# Altium PCB MCUboard.PcbDoc
Units mil, origin at the board's own origin, x right, y up, seen from the top; angles counter-clockwise.
Board outline 3937.01 x 1377.95 mil, 2 copper layers (Top Layer, Bottom Layer); 63 components, 51 nets, 233 pads, 45 vias.
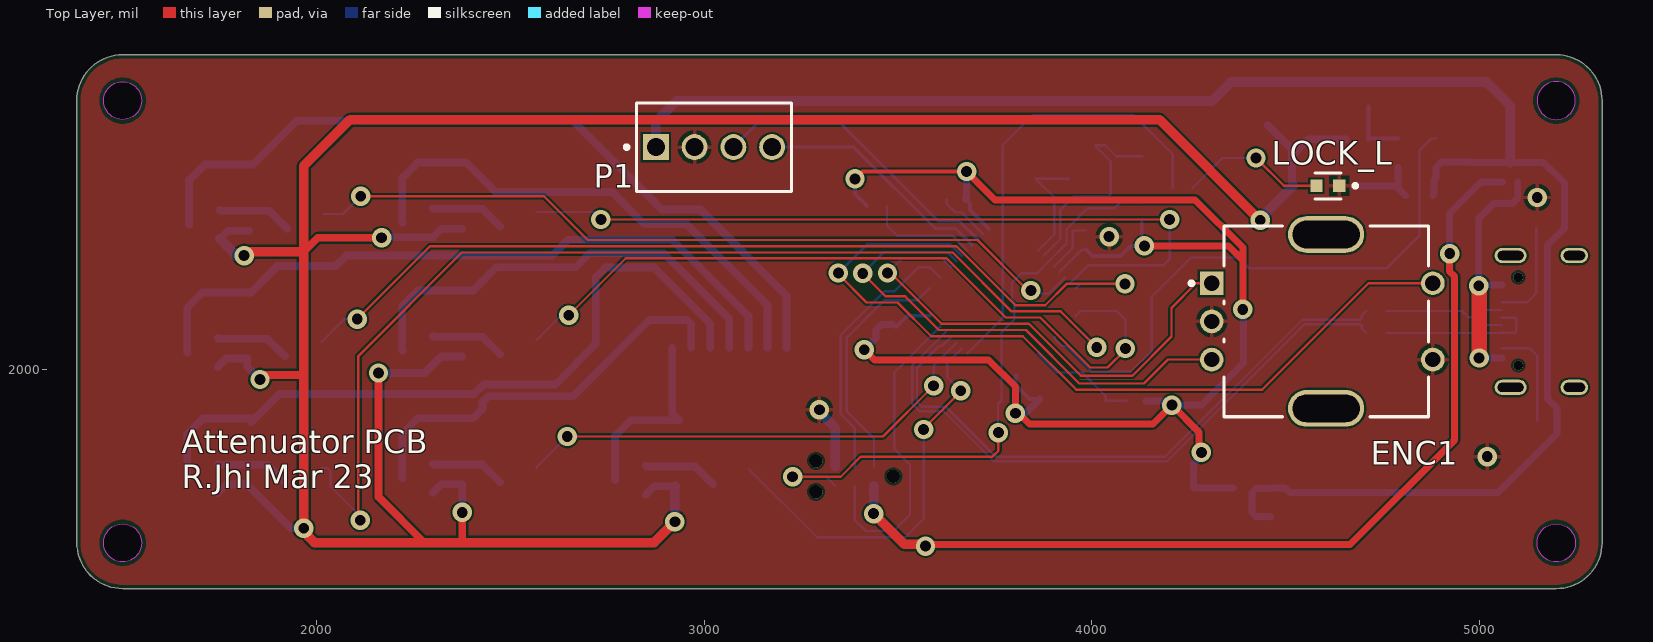
[diagram p0: Top Layer view]
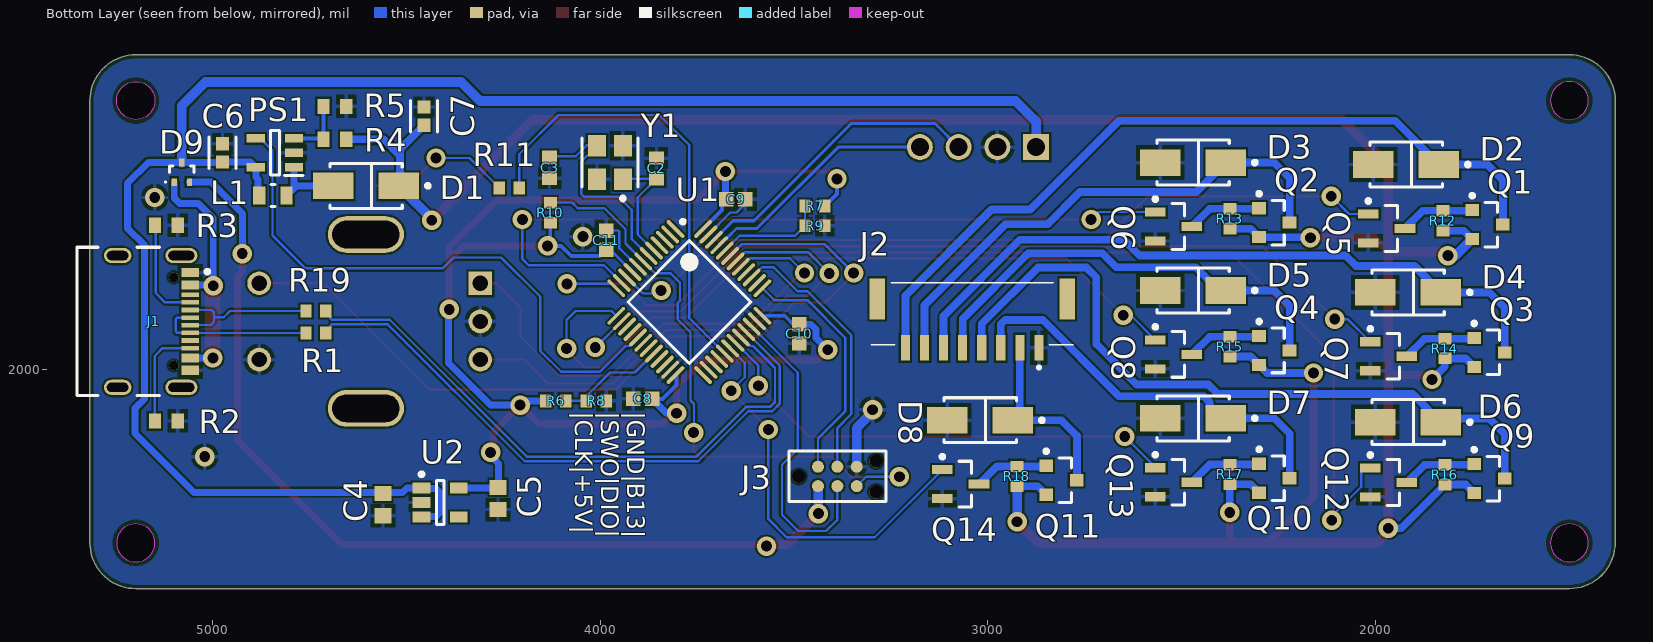
[diagram p1: Bottom Layer view, seen from below]
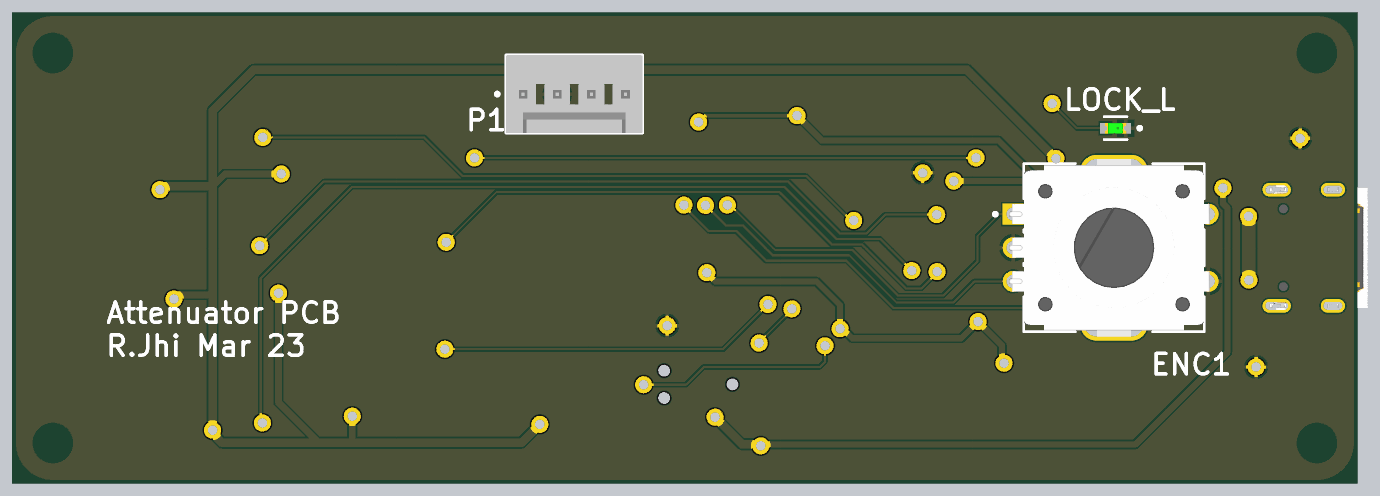
[diagram p2: 3D render of the assembled board from above, using the file's embedded part models]
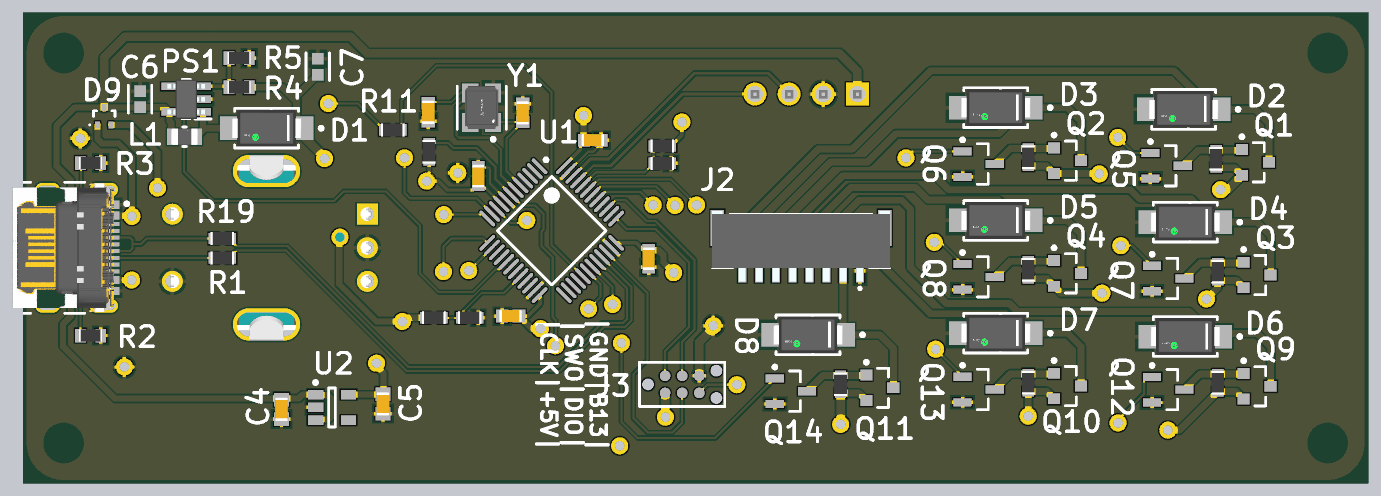
[diagram p3: 3D render of the assembled board from below, using the file's embedded part models]

## Layer stack, top to bottom
Top Solder: solder mask 0.4, Solder Resist, Dk 3.5
Top Layer: signal copper 1.4
Dielectric 1: dielectric 12.6, FR-4, Dk 4.8
Bottom Layer: signal copper 1.4
Bottom Solder: solder mask 0.4, Solder Resist, Dk 3.5

## Board outline
1498.36,1435.25 cw(c1498.36,1553.36) 1380.25,1553.36 1380.25,2695.09 cw(c1498.36,2695.09) 1498.36,2813.2 5199.15,2813.2 cw(c5199.15,2695.09) 5317.26,2695.09 5317.26,1553.36 cw(c5199.15,1553.36) 5199.15,1435.25
cut-out: 5149.94,2695.09 ccw(c5199.15,2695.09) 5199.15,2645.88 ccw(c5199.15,2695.09) 5248.36,2695.09 ccw(c5199.15,2695.09) 5199.15,2744.31 ccw(c5199.15,2695.09)
cut-out: 5149.94,1553.36 cw(c5199.15,1553.36) 5199.15,1602.57 cw(c5199.15,1553.36) 5248.36,1553.36 cw(c5199.15,1553.36) 5199.15,1504.15 cw(c5199.15,1553.36)
cut-out: 1498.36,1504.15 cw(c1498.36,1553.36) 1449.15,1553.36 cw(c1498.36,1553.36) 1498.36,1602.57 cw(c1498.36,1553.36) 1547.57,1553.36 cw(c1498.36,1553.36)
cut-out: 1498.36,2645.88 cw(c1498.36,2695.09) 1449.15,2695.09 cw(c1498.36,2695.09) 1498.36,2744.31 cw(c1498.36,2695.09) 1547.57,2695.09 cw(c1498.36,2695.09)

## Design rules (kind name [scope] priority, off if disabled: settings)
BoardOutlineClearance [All] p1: gap=10 ignorepadtopadclearanceinfootprint=FALSE
Clearance [All] p1: gap=5 ignorepadtopadclearanceinfootprint=FALSE except(0: Arc-Hole Track-Hole SMDPad-Hole THPad-Hole Via-Hole Fill-Hole Poly-Hole Region-Hole Text-Hole; 10: SMDPad-Text THPad-Via THPad-Text Via-Via Via-Text Fill-Text Poly-Text Region-Text Text-Text)
DiffPairsRouting [All] p1: maxlimit=10 minlimit=6 mostfreqgap=6 toplayer_minwidth=6.06 toplayer_maxwidth=16 toplayer_prefwidth=16 bottomlayer_minwidth=6.06 bottomlayer_maxwidth=16 bottomlayer_prefwidth=16 maxuncoupledlength=500
MinimumSolderMaskSliver [All] p1: minsoldermaskwidth=2
PolygonConnect [All] p1: connectstyle=Relief reliefconductorwidth=10 reliefentries=4 polygonreliefangle="90 Angle" airgapwidth=10
RoomDefinition MCUboard [InComponentClass('MCUboard') vs False] p1: confinementstyle=ConfineIn formatcopy=TRUE lockcomponents=FALSE outline 1000,1000
RoomDefinition USB_PWR_CLK [InComponentClass('USB_PWR_CLK') vs False] p2: confinementstyle=ConfineIn formatcopy=TRUE lockcomponents=FALSE outline 1000,1000
RoutingVias [All] p1: holewidth=28 width=50 viastyle="Through Hole" minholewidth=28 minwidth=50 maxholewidth=28 maxwidth=50
SolderMaskExpansion [All] p1: expansion=4 istentingtop=FALSE
Width Width_1 [All] p1: maxlimit=200 minlimit=6 preferedwidth=20 minimp=50.000000 maximp=50.000000 favimp=50.000000
Width [All] p2: maxlimit=250 minlimit=6 preferedwidth=10 minimp=50.000000 maximp=50.000000 favimp=50.000000
28 further rules are at their usual default settings.

## Classes and differential pairs
differential pair class USB: USB
component class USB_PWR_CLK: C2 C3 C4 C5 C6 C7 D1 D9 J1 L1 PS1 R1 R2 R3 R4 R5 R19 U2 Y1
component class U_RELAY_DRIVER: D2 D3 D4 D5 D6 D7 D8 Q1 Q2 Q3 Q4 Q5 Q6 Q7 Q8 Q9 Q10 Q11 Q12 Q13 Q14 R12 R13 R14 R15 R16 R17 R18
component class MCUboard: C8 C9 C10 C11 ENC1 J2 J3 LOCK_L P1 R6 R7 R8 R9 R10 R11 U1
differential pair USB: +USB_P -USB_N

## Components (designator, comment, footprint, x,y, rotation, side; value= is the part's Value field where it differs from the comment)
C2 "Capacitor 10 pF +/- 0.25 pF 50 V 0603" CAPC1608X87X35NL15T15 3855,2520 r90 bottom value=10pF
C3 "Capacitor 10 pF +/- 0.25 pF 50 V 0603" CAPC1608X87X35NL15T15 4131,2521.57 r270 bottom value=10pF
C4 "Capacitor 1uF +/- 10% 16V 0603" CAPC1608X90X35ML15T15 4561,1652 r90 bottom value=1µF
C5 "Capacitor 1uF +/- 10% 16V 0603" CAPC1608X90X35ML15T15 4264,1668 r90 bottom value=1µF
C6 "GRM188R61E475KE11D" FP-GRM188-0_15-IPC_C 4975,2560 r90 bottom
C7 "GRM188R61E475KE11D" FP-GRM188-0_15-IPC_C 4455,2655 r90 bottom
C8 "Capacitor 100 nF +/-10% 50 V 0603" CAPC1608X90X40NL10T20 3890.39,1925 r0 bottom value=100nF
C9 "Capacitor 100 nF +/-10% 50 V 0603" CAPC1608X90X40NL10T20 3650,2440 r180 bottom value=100nF
C10 "Capacitor 100 nF +/-10% 50 V 0603" CAPC1608X90X40NL10T20 3486,2093 r270 bottom value=100nF
C11 "Capacitor 100 nF +/-10% 50 V 0603" CAPC1608X90X40NL10T20 3985,2335 r90 bottom value=100nF
D1 "SS14" FP-403AE-MFG 4604.65,2475 r180 bottom
D2 "SS14" FP-403AE-MFG 1920,2530 r180 bottom
D3 "SS14" FP-403AE-MFG 2470,2535 r180 bottom
D4 "SS14" FP-403AE-MFG 1915,2200 r180 bottom
D5 "SS14" FP-403AE-MFG 2470,2205 r180 bottom
D6 "SS14" FP-403AE-MFG 1915,1865 r180 bottom
D7 "SS14" FP-403AE-MFG 2470,1875 r180 bottom
D8 "SS14" FP-403AE-MFG 3019.65,1870 r180 bottom
D9 "BAT54CTT1G" ONSC-SC-75-3-463-01_V 5080,2510 r90 bottom
ENC1 "PEC11R-4215F-S0024" FP-PEC11R-4215F-S0024-MFG 4605,2125 r270 top
J1 "USB4105-GF-A" FP-USB4105-GF-A-MFG 5200,2125 r270 bottom
J2 "SM08B-GHS-TB_LF__SN_" SM08BGHSTBLFSN 3040,2065 r0 bottom
J3 "ICSP" TC2030-MCP-NL 3488,1725 r180 bottom
L1 "MLZ2012N100LT000" FP-MLZ2012-1_25-MFG 4845,2450 r180 bottom
LOCK_L "LTST-C190GKT" FP-LTST-C190GKT-MFG 4609.53,2475 r180 top
P1 "22-27-2041" MOLX-22-27-2041_V 3025,2575 r180 top
PS1 "AP3015AKTR-G1" SOT95P280X145-5N 4840,2560 r0 bottom
Q1 "NTR4171PT1G" ONSC-SOT-23-3-318-08_V 1710,2375 r180 bottom
Q2 "NTR4171PT1G" ONSC-SOT-23-3-318-08_V 2260,2380 r180 bottom
Q3 "NTR4171PT1G" ONSC-SOT-23-3-318-08_V 1705,2045 r180 bottom
Q4 "NTR4171PT1G" ONSC-SOT-23-3-318-08_V 2260,2050 r180 bottom
Q5 "2N7002" INF-PG-SOT23_M 1970,2365 r180 bottom
Q6 "2N7002" INF-PG-SOT23_M 2520,2370 r180 bottom
Q7 "2N7002" INF-PG-SOT23_M 1965,2035 r180 bottom
Q8 "2N7002" INF-PG-SOT23_M 2520,2040 r180 bottom
Q9 "NTR4171PT1G" ONSC-SOT-23-3-318-08_V 1705,1719.41 r180 bottom
Q10 "NTR4171PT1G" ONSC-SOT-23-3-318-08_V 2260,1720 r180 bottom
Q11 "NTR4171PT1G" ONSC-SOT-23-3-318-08_V 2809.65,1715 r180 bottom
Q12 "2N7002" INF-PG-SOT23_M 1965,1709.41 r180 bottom
Q13 "2N7002" INF-PG-SOT23_M 2520,1710 r180 bottom
Q14 "2N7002" INF-PG-SOT23_M 3069.65,1705 r180 bottom
R1 "ERJ3EKF1002V" RESC1609X55X30LL15T15 4734,2095 r0 bottom
R2 "Resistor 10k +/-1% 0603 100 mW" RESC1608X55X25ML10T15 5120,1868 r0 bottom value=5.1K
R3 "Resistor 10k +/-1% 0603 100 mW" RESC1608X55X25ML10T15 5120,2373 r0 bottom value=5.1K
R4 "Resistor 10k +/-1% 0603 100 mW" RESC1608X55X25ML10T15 4685,2595 r180 bottom value=10k
R5 "Resistor 10k +/-1% 0603 100 mW" RESC1608X55X25ML10T15 4685,2680 r0 bottom value=10k
R6 "ERJ3EKF1002V" RESC1609X55X30LL15T15 4115,1920 r0 bottom
R7 "ERJ3EKF1002V" RESC1609X55X30LL15T15 3446,2423 r180 bottom
R8 "ERJ3EKF1002V" RESC1609X55X30LL15T15 4010.59,1920 r0 bottom
R9 "ERJ3EKF1002V" RESC1609X55X30LL15T15 3446,2372 r0 bottom
R10 "ERJ3EKF1002V" RESC1609X55X30LL15T15 4129,2405.59 r270 bottom
R11 "ERJ3EKF1002V" RESC1609X55X30LL15T15 4235,2470 r180 bottom
R12 "ERJ3EKF1002V" RESC1609X55X30LL15T15 1825,2385 r270 bottom
R13 "ERJ3EKF1002V" RESC1609X55X30LL15T15 2375,2390 r270 bottom
R14 "ERJ3EKF1002V" RESC1609X55X30LL15T15 1820,2055 r270 bottom
R15 "ERJ3EKF1002V" RESC1609X55X30LL15T15 2375,2060 r270 bottom
R16 "ERJ3EKF1002V" RESC1609X55X30LL15T15 1820,1729.41 r270 bottom
R17 "ERJ3EKF1002V" RESC1609X55X30LL15T15 2375,1730 r270 bottom
R18 "ERJ3EKF1002V" RESC1609X55X30LL15T15 2924.65,1725 r270 bottom
R19 "ERJ3EKF1002V" RESC1609X55X30LL15T15 4734,2152 r0 bottom
U1 "STM32F103C8T6" STM-LQFP48_L 3770,2175 r225 bottom
U2 "ADP122AUJZ-3.3-R7" ADI-UJ-5_M 4413.23,1657.6 r180 bottom
Y1 "ABM8G-16.000MHZ-18-D2Y-T" FP-ABM8G-MFG 3975,2535 r90 bottom

## Footprints (in the part's own frame and the unit in brackets; to place one, negate y for a bottom-side part, rotate by r counter-clockwise, add the part's x,y. Pads: shape width x height; smd on the part's side, far side on the other; paste and mask are expansions set on the pad)
ADI-UJ-5_M [mm] "SOT23, 5-Leads, Body 2.9x1.6mm, Pitch 0.95mm, IPC Low Density"
  rect 1.15x0.7 smd: 1(-1.225,0.95) 2(-1.225,0) 3(-1.225,-0.95) 4(1.225,-0.95) 5(1.225,0.95)
  silkscreen extent -1.35,-1.45 0.25,1.97, body extent -0.8,-1.45 0.8,1.45, height 1
CAPC1608X87X35NL15T15 [mm] "Chip Capacitor, 2-Leads, Body 1.75x0.95mm, IPC Medium Density"
  rect 0.9x1 smd: 1(-0.675,0) 2(0.675,0)
  body extent -0.87,-0.48 0.87,0.48, height 0.87
CAPC1608X90X35ML15T15 [mm] "Chip Capacitor, 2-Leads, Body 1.75x0.95mm, IPC Low Density"
  rect 1x1.1 smd: 1(-0.725,0) 2(0.725,0)
  body extent -0.87,-0.48 0.87,0.48, height 0.9
CAPC1608X90X40NL10T20 [mm] "Chip Capacitor, 2-Leads, Body 1.70x0.90mm, IPC Medium Density"
  rect 0.95x0.95 smd: 1(-0.625,0) 2(0.625,0)
  body extent -0.85,-0.45 0.85,0.45, height 0.9
FP-403AE-MFG [mm]
  rect 2.65x1.75 smd paste+0 mask+0: 1(-2.15,0) 2(2.15,0)
  silkscreen extent -2.37,-1.48 4.17,1.48, body extent -2.6,-1.36 2.6,1.36, height 2.5
FP-ABM8G-MFG [mm]
  rect 1.4x1.2 smd paste+0 mask+0: 1(-1.1,-0.85) 2(1.1,-0.85) 3(1.1,0.85) 4(-1.1,0.85)
  silkscreen extent -2.47,-1.83 1.6,1.83, body extent -1.6,-1.25 1.6,1.25, height 1
FP-GRM188-0_15-IPC_C [mil]
  rect 33.71x33.79 smd paste+0 mask+0: 1(-23.66,0) 2(23.66,0)
  silkscreen extent -41,-34 41,34
FP-LTST-C190GKT-MFG [mm]
  rect 0.8x0.8 smd paste+0 mask+0: 1(-0.75,0) 2(0.75,0)
  silkscreen extent -1.92,-0.85 0.85,0.85, body extent -1.25,-0.55 1.25,0.55, height 0.25
FP-MLZ2012-1_25-MFG [mm]
  rect 0.8x1.2 smd paste+0 mask+0: 1(-0.9,0) 2(0.9,0)
  silkscreen extent -0.13,-0.72 0.13,0.72, body extent -1,-0.63 1,0.63, height 1.45
FP-PEC11R-4215F-S0024-MFG [mm]
  round 1.55 hole 1 paste-1000 mask+0: 1(-2.5,7) 2(2.5,7) B(2.5,-7.5) C(0,-7.5)
  rrect100% 2.4x5 hole 4.4 slot 1.8 at 0 deg paste-1000 mask+0: 3(-5.7,0) 4(5.7,0)
  rect 1.55x1.55 hole 1 paste-1000 mask+0: A(-2.5,-7.5)
  silkscreen extent -6.25,-8.95 6.25,6.7, body extent -7,-8.37 7,7.88, height 0.25
FP-USB4105-GF-A-MFG [mm]
  rrect100% 1x2.1 hole 1.7 slot 0.6 at 0 deg paste-1000 mask+0: 1(-4.32,3.015) 2(4.32,3.015)
  rrect100% 1x1.8 hole 1.4 slot 0.6 at 0 deg paste-1000 mask+0: 3(-4.32,-1.165) 4(4.32,-1.165)
  rect 0.6x1.15 smd paste+0 mask+0: A1-B12(-3.2,3.59) A4-B9(-2.4,3.59) B1-A12(3.2,3.59) B4-A9(2.4,3.59)
  rect 0.3x1.15 smd paste+0 mask+0: A5(-1.25,3.59) A6(-0.25,3.59) A7(0.25,3.59) A8(1.25,3.59) B5(1.75,3.59) B6(0.75,3.59) B7(-0.75,3.59) B8(-1.75,3.59)
  round 0.65 hole 0.65 unplated paste-1000 mask+0: ""(-2.89,2.515) ""(2.89,2.515)
  silkscreen extent -4.86,-3.84 4.86,4.84, body extent -4.79,-3.76 4.79,3.77, height 3.26
INF-PG-SOT23_M [mm] "SOT23, 3-Leads, Body 2.9x1.3mm, Pitch 0.95mm, IPC Low Density"
  rect 1.35x0.6 smd: 1(-1.2,0.95) 2(-1.2,-0.95) 3(1.2,0)
  silkscreen extent -1.33,-1.5 0.7,1.92, body extent -0.7,-1.5 0.7,1.5, height 1.1
MOLX-22-27-2041_V [mm] "CONN, 4-Leads, Body 10.16x5.8mm, Pitch 2.54mm"
  rect 1.7x1.7 hole 1.19: 1(3.81,0)
  round 1.7 hole 1.19: 2(1.27,0) 3(-1.27,0) 4(-3.81,0)
  silkscreen extent -5.08,-2.9 5.85,2.9, body extent -5.08,-2.9 5.08,2.9, height 11.7
ONSC-SC-75-3-463-01_V [mil] "SOT23, 3-Leads, Body 1.6x0.8mm, Pitch 0.5mm"
  rect 20x14.02 smd: 1(-25.49,19.69) 2(-25.49,-19.69) 3(25.49,0)
  silkscreen extent -27,-31 16,44, body extent -16,-31 16,31, height 35
ONSC-SOT-23-3-318-08_V [mm] "SOT23, 3-Leads, Body 2.92x1.3mm, Pitch 0.95mm"
  rect 0.9x0.8 smd: 1(-1,0.95) 2(-1,-0.95) 3(1,0)
  silkscreen extent -1.13,-1.46 0.65,2.02, body extent -0.65,-1.46 0.65,1.46, height 1.11
RESC1608X55X25ML10T15 [mm] "Chip Resistor, 2-Leads, Body 1.70x0.90mm, IPC Low Density"
  rect 0.8x1 smd: 1(-0.75,0) 2(0.75,0)
  body extent -0.85,-0.45 0.85,0.45, height 0.55
RESC1609X55X30LL15T15 [mm] "Chip Resistor, 2-Leads, Body 1.75x0.95mm, IPC High Density"
  rect 0.75x0.85 smd: 1(-0.65,0) 2(0.65,0)
  body extent -0.87,-0.48 0.87,0.48, height 0.55
SM08BGHSTBLFSN [mm]
  rect 0.6x1.7 smd: 1(-4.375,0.2) 2(-3.125,0.2) 3(-1.875,0.2) 4(-0.625,0.2) 5(0.625,0.2) 6(1.875,0.2) 7(3.125,0.2) 8(4.375,0.2)
  rect 1x2.7 smd: 9(-6.225,-3) 10(6.225,-3)
  silkscreen extent -6.63,-4.05 6.63,1.6, body extent -6.63,-4.25 6.63,0.99, height 4.15
SOT95P280X145-5N [mm]
  rect 1.2x0.55 smd: 1(-1.25,0.95) 2(-1.25,0) 3(-1.25,-0.95) 4(1.25,-0.95) 5(1.25,0.95)
  silkscreen extent -1.85,-1.46 0.3,1.48, body extent -1.4,-1.46 1.4,1.46, height 1.45
STM-LQFP48_L [mm] "QFP, 48-Leads, Body 7x7mm, Pitch 0.5mm, IPC High Density"
  oval 1.55x0.25 smd: 1(-4.025,2.75) 2(-4.025,2.25) 3(-4.025,1.75) 4(-4.025,1.25) 5(-4.025,0.75) 6(-4.025,0.25) 7(-4.025,-0.25) 8(-4.025,-0.75) 9(-4.025,-1.25) 10(-4.025,-1.75) 11(-4.025,-2.25) 12(-4.025,-2.75) 25(4.025,-2.75) 26(4.025,-2.25) 27(4.025,-1.75) 28(4.025,-1.25) 29(4.025,-0.75) 30(4.025,-0.25) 31(4.025,0.25) 32(4.025,0.75) 33(4.025,1.25) 34(4.025,1.75) 35(4.025,2.25) 36(4.025,2.75)
  oval 0.25x1.55 smd: 13(-2.75,-4.025) 14(-2.25,-4.025) 15(-1.75,-4.025) 16(-1.25,-4.025) 17(-0.75,-4.025) 18(-0.25,-4.025) 19(0.25,-4.025) 20(0.75,-4.025) 21(1.25,-4.025) 22(1.75,-4.025) 23(2.25,-4.025) 24(2.75,-4.025) 37(2.75,4.025) 38(2.25,4.025) 39(1.75,4.025) 40(1.25,4.025) 41(0.75,4.025) 42(0.25,4.025) 43(-0.25,4.025) 44(-0.75,4.025) 45(-1.25,4.025) 46(-1.75,4.025) 47(-2.25,4.025) 48(-2.75,4.025)
  silkscreen extent -4.15,-2.85 2.85,3.55, body extent -3.5,-3.5 3.5,3.5, height 1.6
TC2030-MCP-NL [mil]
  round 31 smd: 1(50,-25) 2(50,25) 3(100,-25) 4(100,25) 5(150,-25) 6(150,25)
  round 34 hole 35 unplated: A(0,0) B(200,40) C(200,-40)
  silkscreen extent -25,-65 225,65

## Part data
C2 C3: library part CMP-001-00012-7, "Chip Capacitor, 10 pF, +/- 0.25 pF, 50 V, 0603 (1608 Metric)", Capacitor Type=Ceramic, Case/Package=0603, Max Operating Temperature=125°C, Min Operating Temperature=-55°C, Tolerance=0.25%, Voltage Rating=50V, Mounting Technology=SM, Pins=2, RoHS Compliant=True
C4 C5: library part CMP-001-00004-7, "Chip Capacitor, 1 uF, +/- 10%, 16 V, 0603 (1608 Metric)", Capacitor Type=Ceramic, Case/Package=0603, Max Operating Temperature=125°C, Min Operating Temperature=-55°C, Tolerance=10%, Voltage Rating=16V, Mounting Technology=SM, Pins=2, RoHS Compliant=True
C6 C7: library part CMP-2006-02523-2, "Chip Multilayer Ceramic Capacitors for General Purpose, 0603, 4.7uF, X5R, 15%, 10%, 25V", Capacitance=4.7uF, Case Code (Imperial)=0603, Case Code (Metric)=1608, Dielectric=X5R, Max Operating Temperature=85°C, Min Operating Temperature=-55°C, Package Quantity=4000, Tolerance=10%, Voltage=25V, Case/Package=0603, Depth=0.8mm, Height=0.8mm, Lead Free="Lead Free", Length=1.6mm, Material=Ceramic, Mount="Surface Mount", Packaging="Cut Tape", REACH SVHC="No SVHC", Thickness=0.031inch, Voltage Rating=25V, Voltage Rating (DC)=25V, Width=0.031inch
C8 C9 C10 C11: library part CMP-001-00017-7, "Chip Capacitor, 100 nF, +/- 10%, 50 V, 0603 (1608 Metric)", Capacitor Type=Ceramic, Case/Package=0603, Max Operating Temperature=125°C, Min Operating Temperature=-55°C, Tolerance=10%, Voltage Rating=50V, Mounting Technology=SM, Pins=2, RoHS Compliant=True
D1 D2 D3 D4 D5 D6 D7 D8: library part CMP-2000-04943-2, "DIODE SCHOTTKY 40V 1A SMA", Forward Current=1A, Manufacturer="ON Semiconductor", Max Junction Temp=+125°C, Max Repetitive Reverse Voltage=40V, Max Surge Forward Current=40A, Package=403AE, Peak Reverse Current=0.2mA, Temperature="-65°C to +125°C", Temperature Range Low=-65°C, Automotive=No, Category=Diode, ComponentLink2Description=Datasheet, ComponentLink2URL=https://www.onsemi.com/pub/Collateral/SS19-D.PDF, Device Class L1="Discrete Semiconductors", Device Class L2=Diodes, Device Class L3="Schottky Diodes", Digikey Description="DIODE SCHOTTKY 40V 1A SMA", Height=2.5mm, Lead Free=Yes, Manufacturer Part Number=SS14, Mouser Description="Schottky Diodes & Rectifiers SMA 40V 1.0A", Octopart=https://octopart.com/ss14-on+semiconductor-29205033, RoHS=TRUE, Standoff Height=0.05mm, Temperature Range High=+125°C
D9: library part CMP-1055-00298-1, "Dual Series Cathode Schottky Barrier Diodes, 3-Pin SC-75, Pb-Free, Tape and Reel", Manufacturer="On Semiconductor", ComponentLink1Description="Manufacturer URL", ComponentLink1URL=http://www.onsemi.com/, ComponentLink2Description=Datasheet, ComponentLink2URL=http://www.onsemi.cn/pub_link/Collateral/BAT54CTT1-D.PDF, ComponentLink3Description="Package Specification", ComponentLink3URL=http://www.onsemi.com/pub_link/Collateral/463-01.PDF, Configuration="Common Cathode", DatasheetVersion="Rev. 4", IFSM Max (A)=0.6, Mounting Technology="Surface Mount", PackageDescription="3-Pin Small Outline Transistor, Body 1.6 x 0.8 mm, Pitch 0.5 mm", PackageReference=SC-75-3-463-01, PackageVersion="Rev. F, 07/2005", Packing="Tape and Reel", PartNumber=BAT54CTT1G, RoHS=TRUE, trr Max (ns)=5
ENC1: library part CMP-1747-00012-2, "ROTARY ENCODER MECHANICAL 24PPR", Max Operating Temperature=70°C, Min Operating Temperature=-30°C, Package Quantity=150, Built in Switch=Yes, Detent=Yes, Encoder Type=Mechanical, Height=13.4mm, Hole Diameter=1.8mm, Length=21.5mm, Mount="Through Hole", Number of Channels=2, Orientation=Vertical, Output Type=Quadrature, Packaging=Bulk, Pulses per Revolution=24, Radiation Hardening=No, REACH SVHC="No SVHC", RoHS Compliant=Yes, Series=PEC11R, Termination="PC Pins", Type=Mechanical, Width=12.5mm
J1: library part CMP-002-00072-3, "Conn USB 2.0 Type C RCP 24 POS 0.3mm/0.5mm Solder RA SMD 24 Terminal 1 Port T/R"
J2: "Connector", Arrow Part Number=SM08B-GHS-TB(LF)(SN), Manufacturer_Name="JST (JAPAN SOLDERLESS TERMINALS)", Arrow Price/Stock=https://www.arrow.com/en/products/sm08b-ghs-tb-lf-sn/jst-manufacturing, Datasheet Link=http://www.jst-mfg.com/product/pdf/eng/eGH.pdf, Height=4.05mm, Manufacturer_Part_Number=SM08B-GHS-TB(LF)(SN)
J3: library part CMP-008-000000-2, Component Type=Standard, Design Item ID=ICSP, Pin Count=5, Source=TC2030.SchLib
L1: library part CMP-08253-000052-1, "Shielded Multilayer Inductor 10uH ±20% 500mA 390mΩ SMD 0805", Case Code (Imperial)=0805, Case Code (Metric)=2012, Current Rating=500mA, DC Resistance (DCR)=390mR, Inductance=10uH, Max Operating Temperature=125°C, Min Operating Temperature=-55°C, Package Quantity=1, Saturation Current=110mA, Self Resonant Frequency=50MHz, Test Frequency=2MHz, Tolerance=20%, Case/Package=0805, Core Material=Ferrite, Height - Seated (Max)=0.057inch, Length=0.079inch, Mount="Surface Mount", Packaging="Tape and Reel", RoHS Compliant=Yes, Shielding=Shielded, Width=0.049inch
LOCK_L: library part CMP-22017-000005-2, "LED GREEN CLEAR CHIP SMD", Case Code (Imperial)=0603, Case Code (Metric)=1608, Color=Green, Forward Current=30mA, Forward Voltage=2.1V, Lens Color=Colorless, Max Operating Temperature=85°C, Min Operating Temperature=-55°C, Package Quantity=1, Power Dissipation=100mW, Reverse Voltage=5V, Test Current=10mA, Voltage=2V, Case/Package=0603, Depth=0.8mm, Dominant Wavelength=569nm, Height=0.8mm, Illumination Color=Green, Lead Free="Lead Free", Length=1.6mm, Lens Style=Clear, Lens Transparency=Clear, Luminous Intensity=6mcd, Mount="Surface Mount", Number of Elements=1, Number of LEDs=1, Number of Pins=2, Packaging="Tape and Reel", Power Rating=100mW, Radiation Hardening=No, Viewing Angle=130°, Wavelength=565nm, Width=0.8mm
P1: library part CMP-2000-05243-1, "Male Header, Pitch 2.54 mm, 1 x 4 Position, Height 11.7 mm, Tail Length 3.56 mm, RoHS, Bulk", Current Rating=4A, Manufacturer=Molex, Operating temperature=0degCto+75degC, Voltage Rating=250V, Contact Material=Tinplatedbrass, Datasheet URL=http://www.molex.com/pdm_docs/sd/022272041_sd.pdf, Datasheet Version="Rev. F, 06/2009", Housing Material=Nylon(UL94V-0), Manufacturer URL=http://www.molex.com/
PS1: "Power Supply", Manufacturer_Name="Diodes Inc.", Mouser Part Number=621-AP3015AKTR-G1, Arrow Part Number=AP3015AKTR-G1, Arrow Price/Stock=https://www.arrow.com/en/products/ap3015aktr-g1/diodes-incorporated?region=nac, Datasheet Link=https://www.diodes.com/assets/Datasheets/AP3015_A.pdf, Height=1.45mm, Manufacturer_Part_Number=AP3015AKTR-G1, Mouser Price/Stock=https://www.mouser.co.uk/ProductDetail/Diodes-Incorporated/AP3015AKTR-G1?qs=x6A8l6qLYDBKZpaE8%2FwCMQ%3D%3D
Q1 Q2 Q3 Q4 Q9 Q10 Q11: library part CMP-1058-00738-1, "Power MOSFET, -30 V, 3.5 A, Single P-Channel, 3-Pin SOT-23, Pb-Free, Tape and Reel", Manufacturer="On Semiconductor", Package Type=SOT-23-3, Channel Polarity="P Channel", Ciss Typ (pF)=720, ComponentLink1Description="Manufacturer URL", ComponentLink1URL=http://www.onsemi.com/, ComponentLink2Description=Datasheet, ComponentLink2URL=http://www.onsemi.cn/pub_link/Collateral/NTR4171P-D.PDF, ComponentLink3Description="Package Specification", ComponentLink3URL=http://www.onsemi.cn/pub_link/Collateral/318-08.PDF, Configuration=Single, Coss Typ (pF)=95, Crss Typ (pF)=65, DatasheetVersion="Rev. 1", Mounting Technology="Surface Mount", PackageDescription="3-Pin Small Outline Transistor, Body 2.92 x 1.3 mm, Pitch 0.95 mm", PackageReference=SOT-23-3-318-08, PackageVersion="Rev. AP, 11/2009", Packing="Tape and Reel", PartNumber=NTR4171PT1G, Qrr Typ (nC)=8, RoHS=Pb-Free, V(BR)DSS Min (V)=30, VGS Max (V)=12, VGS(th) Max (V)=1.4
Q5 Q6 Q7 Q8 Q12 Q13 Q14: library part CMP-1149-00026-1, "N-Channel OptiMOS Small-Signal-Transistor, 60 V VDS, 0.3 A ID, -55 to 150 degC, PG-SOT23, Reel, Green", Manufacturer=Infineon, ComponentLink1Description="Manufacturer URL", ComponentLink1URL=http://www.infineon.com/, ComponentLink2Description=Datasheet, ComponentLink2URL=http://www.infineon.com/dgdl/2N7002_Rev2.4.pdf?folderId=db3a3043156fd573011622e10b5c1f67&fileId=db3a304319bc939a0119c2a9461e79e6, ComponentLink3Description="Package Specification", ComponentLink3URL=http://www.infineon.com/dgdl/SOT23-Package_Overview.pdf?folderId=db3a30431936bc4b0119532290053c66&fileId=db3a30431936bc4b0119533468123c85, DatasheetVersion="Rev. 2.4", Green=TRUE, Halogen-free=TRUE, ID (max)="0.3Â A", IDpuls (max)="1.2Â A", Mounting Technology="Surface Mount", PackageDescription="3-Pin Small Outline Transistor Package, 2.9 x 1.3 mm Body, 0.95 mm Pitch", PackageReference=PG-SOT23, PackageVersion=Apr-08, Packing=Reel, PartNumber=2N7002, Ptot (max)="0.5Â W", QG="0.4Â nC", RDS (on) (max)="3,000 mOhm", RDS (on) (max) (@4.5V)="4,000 mOhm", RthJA (max)="250 K/W", VDS (max)="60 V", VGS(th) (max)="2.5Â V", VGS(th) (min)="1.5Â V"
R1 R19: library part CMP-1012-00623-3, "Chip Resistor, 10 KOhm, +/- 1%, 0.1 W, -55 to 155 degC, 0603 (1608 Metric), RoHS, Tape and Reel", Case Code (Imperial)=0603, Case Code (Metric)=1608, Manufacturer=Panasonic, Max Operating Temperature=155degC, Max Power Dissipation=100mW, Min Operating Temperature=-55degC, Package Description="2-Pin Surface Mount Device, Body 1.6 x 0.85 mm", Package Quantity=1, Package Reference=603, Resistance=20, Temperature Coefficient=100ppm\/degreesC, Tolerance=1%, Voltage Rating=75V, Case\/Package=0603, Composition=ThickFilm, Contact Plating=Tin, Datasheet URL=https://industrial.panasonic.com/cdbs/www-data/pdf/RDA0000/AOA0000C304.pdf, Datasheet Version=02/2017, Depth=0.8mm, Height=0.45mm, Lead Free=LeadFree, Length=1.6mm, Manufacturer URL=http://www.panasonic.com/, Military Standard=Not, Mount=SurfaceMount, Mounting Technology=SurfaceMount, Number of Pins=2, Number of Terminations=2, Packaging=TapeandReel, Power Rating=100mW, Radiation Hardening=No, REACH SVHC=NoSVHC, RoHSCompliant=true, Termination=SMD/SMT, Voltage Rating (DC)=75V, Width=0.031inch
R2 R3 R4 R5: library part CMP-009-00017-5, "Chip Resistor, 10 KOhm, +/- 1%, 01 W, -55 to 155 degC, 0603 (1608 Metric)", Case/Package=0603, Max Operating Temperature=155°C, Min Operating Temperature=-55°C, Power=100mW, Tolerance=1%, Voltage Rating=50V, Mounting Technology=SM, Pins=2, RoHS Compliant=True
R6 R7 R8 R9 R10 R11 R12 R13 R14 R15 R16 R17 R18: library part CMP-1012-00623-3, "Chip Resistor, 10 KOhm, +/- 1%, 0.1 W, -55 to 155 degC, 0603 (1608 Metric), RoHS, Tape and Reel", Case Code (Imperial)=0603, Case Code (Metric)=1608, Manufacturer=Panasonic, Max Operating Temperature=155degC, Max Power Dissipation=100mW, Min Operating Temperature=-55degC, Package Description="2-Pin Surface Mount Device, Body 1.6 x 0.85 mm", Package Quantity=1, Package Reference=603, Resistance=10KOhm, Temperature Coefficient=100ppm\/degreesC, Tolerance=1%, Voltage Rating=75V, Case\/Package=0603, Composition=ThickFilm, Contact Plating=Tin, Datasheet URL=https://industrial.panasonic.com/cdbs/www-data/pdf/RDA0000/AOA0000C304.pdf, Datasheet Version=02/2017, Depth=0.8mm, Height=0.45mm, Lead Free=LeadFree, Length=1.6mm, Manufacturer URL=http://www.panasonic.com/, Military Standard=Not, Mount=SurfaceMount, Mounting Technology=SurfaceMount, Number of Pins=2, Number of Terminations=2, Packaging=TapeandReel, Power Rating=100mW, Radiation Hardening=No, REACH SVHC=NoSVHC, RoHSCompliant=true, Termination=SMD/SMT, Voltage Rating (DC)=75V, Width=0.031inch
U1: library part CMP-0237-00215-3, "ARM Cortex-M3 32-bit MCU, 64 KB Flash, 20 KB Internal RAM, 37 I/Os, 48-pin LQFP, -40 to 85 degC, Tray", I/Os (High Current)=37, Operating Frequency(F) (Processor speed) (MHz)=72, Supply Voltage(Vcc) min (V)=2, A/D Converter="2x12-bit (10 Channel)", ComponentLink1Description="Manufacturer URL", ComponentLink1URL=http://www.st.com/web/en/home.html, ComponentLink2Description=Datasheet, ComponentLink2URL=http://www.st.com/st-web-ui/static/active/en/resource/technical/document/datasheet/CD00161566.pdf, ComponentLink3Description="Package Specification", ComponentLink3URL=http://www.st.com/st-web-ui/static/active/en/resource/technical/document/datasheet/DM00058181.pdf, Core="ARM Cortex-M3", DatasheetVersion="Rev. 16", FLASH Size (Prog) (kB)=64, Internal RAM Size (kB)=20, Mounting Technology="Surface Mount", PackageDescription="48-Pin Low Profile Quad Flat Package, 7 x 7 mm Body, 0.5 mm Pitch", PackageReference=LQFP48, PackageVersion="Rev. 6, 06/2013", Packing=Tray, PartNumber=STM32F103C8T6
U2: library part CMP-0786-00346-1, "300 mA, Low Quiescent Current, CMOS Linear Regulator, 2.3 to 5.5 V Vin, 3.3 V Vout, Industrial, 5-pin SOT23 (UJ-5), Reel", Manufacturer="Analog Devices", Preset Vout Values (V)=3.3, Supply Current IGND @ Small Load=45uA, Code_JEDEC=MO-193-AB, ComponentLink1Description="Manufacturer URL", ComponentLink1URL=http://www.analog.com/en/index.html, ComponentLink2Description=Datasheet, ComponentLink2URL=http://www.analog.com/static/imported-files/data_sheets/ADP122_123.pdf, ComponentLink3Description="Package Specification", ComponentLink3URL=http:/www.analog.com/static/imported-files/packages/PKG_PDF/TSOT(UJ)/UJ_5.pdf, ComponentLink4Description="URL Link1", ComponentLink4URL="Product URL:http://www.analog.com/en/ADP122/productSearch.html", DatasheetVersion="Rev. E", Iout max=300mA, Mounting Technology="Surface Mount", PackageDescription="5-Pin Thin Small Outline Transistor Package, Body 2.9 x 1.6 mm, Pitch 0.95 mm", PackageReference=UJ-5, PackageVersion="100708-A, 10/2008", Packing=Reel, PartNumber=ADP122AUJZ-3.3-R7, Vin (max) (V)=5.5, Vin (min) (V)=2.3
Y1: library part CMP-27762-006537-2, "Crystal 16MHz ±20ppm (Tol) ±30ppm (Stability) 18pF FUND 80Ω 4-Pin SMD T/R", Case/Package=CSMD, ESR (Equivalent Series Resistance)=80R, Frequency=16MHz, Frequency Stability=30ppm, Frequency Tolerance=20ppm, Load Capacitance=18pF, Max Operating Temperature=85°C, Min Operating Temperature=-40°C, Operating Frequency="16 MHz", Package Quantity=1000, Depth=2.5mm, Height=1mm, Lead Free="Lead Free", Length=3.2mm, Mount="Surface Mount", Number of Pins=4, Packaging="Tape and Reel", Radiation Hardening=No, Series=ABM8G, Series Resistance=80R, Termination=SMD/SMT, Tolerance=20ppm, Width=2.5mm

## Via types
v1: diameter 50, hole 28, Top Layer to Bottom Layer, 45 vias

## Nets (pads, with @x,y where several pads share a name; then routed paths per layer and width w, separated by ;. In a path a pad name is that pad's centre, name@x,y a point inside that pad or via, vN(x,y) a via of type N, cw(c..) or ccw(c..) an arc to the next point about the centre after c; other vN are vias at no path point)
3V3: C5.2 C8.1 C9.1 C10.1 C11.1 R6.2 R7.2 R10.2 U1.9 U1.24 U1.36 U1.48 U2.5 | length 4222.2
  Top Layer w10: v1(3389,2493) 3408,2512 v1(3677,2512)
  Top Layer w18: v1(3413,2052) 3439,2026 3734,2026 3803,1957 v1(3803,1888) 3811,1888 3839,1860 4158,1860 v1(4207,1909) 4277,1839 4277,1793 v1(4283,1787) ; v1(3677,2512) 3750,2439 4267,2439 4390,2316 4390,2283 ; v1(4136,2320) 4353,2320 4390,2283 ; v1(4390,2156) 4390,2283
  Bottom Layer w6: U1.9 3974.99,2310.39 C11.1
  Bottom Layer w10: v1(3389,2493) 3389,2454.41 R7.2 ; C10.1@3495,2111 3523.67,2139.67 U1.36@3581.22,2139.67 ; C9.1 3685.83,2428.77 3685.83,2412.61 U1.48@3734.67,2363.78 ; U1.24@3805.33,1986.22 3803,1983.9 3803,1961 3839,1925 C8.1 ; C11.1 4001.39,2294 4075,2294 4101,2320 v1(4136,2320) 4129,2327 R10.2
  Bottom Layer w18: v1(3413,2052) 3443,2082 3443,2104 3456.61,2117.61 C10.1 ; C9.1 3677,2442.39 v1(3677,2512) ; v1(3803,1888) 3828.82,1888.03 C8.1 ; R6.2 4196,1920 v1(4207,1909) 4283,1909 4392,2018 4392,2154 v1(4390,2156) ; v1(4283,1787) 4283,1778.34 4262.5,1757.84 4262.5,1698.04 4265.54,1695 U2.5
5VDBG: D9.2 J3.1 | length 2479.7
  Top Layer w18: v1(3571,1545) 3575,1549 4667,1549 4937,1819 4937,2241 4924,2254 v1(4924,2300)
  Top Layer w25: v1(3437,1629) 3516.22,1549.78 3566.22,1549.78 v1(3571,1545)
  Bottom Layer w18: v1(4924,2300) 4924,2404 5004.51,2484.51 D9.2
  Bottom Layer w25: v1(3437,1629) 3437.5,1629.5 3437.5,1699.5 J3.1
12V: C7.1 D1.2 Q1.2 Q2.2 Q3.2 Q4.2 Q9.2 Q10.2 Q11.2 R4.2 R12.2 R13.2 R14.2 R15.2 R16.2 R17.2 R18.2 | length 7463.6
  Top Layer w20: v1(1853,1975) 1865,1987 1966,1987 ; 1966,2305 2002,2341 v1(2167,2341) ; v1(2159,1992) 2159,1672 2277,1554 ; 2372,1554 2375,1557 v1(2375,1632)
  Top Layer w25: v1(1812,2295) 1822,2305 1966,2305 ; v1(2924,1608) 2870,1554 2372,1554 2277,1554 1994,1554 1978.5,1569.5 1978.5,1571.74 1966,1584.24 1966,1987 1966,2305 ; v1(4435,2386) 4175,2646 2086,2646 1966,2526 1966,2305
  Bottom Layer w20: Q9.2 1766.18,1703.82 R16.2 1932.82,1591 v1(1966,1591) ; Q3.2 1766.18,2029.41 R14.2 1820,2008 v1(1853,1975) ; Q1.2 1771.18,2359.41 R12.2 ; v1(2159,1992) 2278.77,1992 Q4.2 2321.18,2034.41 R15.2 ; v1(2167,2341) 2168.6,2342.6 Q2.2 2321.18,2364.41 R13.2 ; Q10.2 2321.18,1704.41 R17.2 v1(2375,1632) ; Q11.2 2870.83,1699.41 R18.2 ; C7.1 4517,2569.34 4517,2553 ; D1.2 4517,2478 4517,2553 ; R4.2 4559,2595 4517,2553
  Bottom Layer w25: Q1.2 1791.97,2295 v1(1812,2295) ; v1(2924,1608) 2924,1698.76 R18.2 ; v1(4435,2386) 4435,2390 D1.2
BOOT0: R7.1 R9.2 U1.44 | length 284.8
  Bottom Layer w6: R7.1 R9.2 3497.59,2346 3640.76,2346 U1.44
BOOT1: R6.1 R8.2 U1.20 | length 285.7
  Bottom Layer w6: U1.20 3910.24,1993 3975,1993 4036.18,1931.82 R8.2 R6.1
ENC_A: ENC1.A U1.41 | length 1277.4
  Top Layer w6: v1(3473,2250) 3481,2250 3612,2119 3838,2119 3972,1985 4105,1985 4206,2086 4206,2160 4269.43,2223.43 ENC1.A
  Bottom Layer w6: v1(3473,2250) 3511,2288 3613.47,2288 3615.28,2286.19 3616.01,2286.19 3636.03,2266.17 U1.41
ENC_B: ENC1.B U1.42 | length 1318.5
  Top Layer w6: v1(3409,2249) 3468,2190 3518.37,2190 3605.37,2103 3830,2103 3968,1965 4135,1965 4196.57,2026.57 ENC1.B
  Bottom Layer w6: v1(3409,2249) 3464,2304 3627.08,2304 U1.42
ENC_SW: ENC1.1 U1.43 | length 2137.5
  Top Layer w6: v1(3346,2250) 3346,2247 3419,2174 3499,2174 3586,2087 3822,2087 3960,1949 4440,1949 4714.43,2223.43 ENC1.1
  Bottom Layer w6: v1(3346,2250) 3421,2325 3633.92,2325 U1.43
GND: C2.2 C3.2 C4.1 C5.1 C6.2 C7.2 C8.2 C9.2 C10.2 C11.2 D2.1 D3.1 D4.1 D5.1 D6.1 D7.1 D8.1 ENC1.2 ENC1.C J1.A1-B12 J1.B1-A12 J2.1 J3.6 LOCK_L.1 P1.2 PS1.2 Q5.2 Q6.2 Q7.2 Q8.2 Q12.2 Q13.2 Q14.2 R2.1 R3.1 R5.1 R8.1 R9.1 U1.8 U1.23 U1.35 U1.47 U2.2 Y1.2 Y1.4 | length 448.5
  Bottom Layer w6: C9.2 3625.39,2428.61 3648,2406 3664.27,2406 U1.47 ; U1.8 3951,2314.24 3951,2356.09 3954.51,2359.61 C11.2
  Bottom Layer w25: v1(3297,1897) 3297,1890.61 3338,1849.61 J3.6
  other v1: 5021,1776 4045,2344 5150,2445
GPIO_A0: Q5.1 U1.10 | length 2053.5
  Top Layer w6: v1(2113,2448) 2586,2448 2699,2335 3705,2335 3835,2205 v1(3843,2205)
  Bottom Layer w6: Q5.1 2067.4,2402.4 v1(2113,2448) ; v1(3843,2205) 3851,2197 3889.44,2197 U1.10
GPIO_A1: Q6.1 U1.11 | length 2025.6
  Top Layer w6: v1(2733,2388) v1(4201,2388)
  Bottom Layer w6: Q6.1 2713.6,2407.4 v1(2733,2388) ; U1.11 3990.27,2270 4185,2270 4201,2286 v1(4201,2388)
GPIO_A2: Q7.1 U1.12 | length 2393.8
  Top Layer w6: v1(2104,2131) 2292,2319 3651,2319 3803,2167 3880,2167 3935,2222 v1(4086,2222)
  Bottom Layer w6: Q7.1 2070.84,2131 v1(2104,2131) ; U1.12 3970.11,2222 v1(4086,2222)
GPIO_A3: Q8.1 U1.13 | length 1962.9
  Top Layer w6: v1(2650,2141) 2797,2288 3625,2288 3778,2135 3867,2135 3996,2006 4041,2006 4087,2052 v1(4087,2055)
  Bottom Layer w6: Q8.1 2630.84,2141 v1(2650,2141) ; U1.13 3971.1,2152 4064,2152 4087,2129 v1(4087,2055)
GPIO_A4: Q12.1 U1.14 | length 2825.2
  Top Layer w6: v1(2112,1612) 2107,1617 2107,2036 2374,2303 3641,2303 3793,2151 3920,2151 v1(4013,2058)
  Bottom Layer w6: Q12.1 2027.01,1746.81 2035.82,1738 2035.82,1698.13 2112,1621.95 v1(2112,1612) ; U1.14 4012.27,2058 v1(4013,2058)
GPIO_A7: PS1.4 U1.17 | length 1509
  Bottom Layer w6: U1.17 3905.42,2083.83 3905.42,2078.84 3922.53,2061.73 3934.27,2061.73 4001,1995 4101,1995 4155,2049 4155,2189 4256,2290 4379,2290 4407,2262 4761,2262 4846,2347 4846,2566 4877.4,2597.4 PS1.4
GPIO_A9: Q14.1 U1.30 | length 1051.8
  Top Layer w6: v1(3566,1846) 3566,1848 3662,1944 v1(3662,1946)
  Bottom Layer w6: Q14.1 3291.29,1568 3519,1568 3566,1615 v1(3566,1846) ; v1(3662,1946) 3627,1981 3627,2018.08 U1.30
GPIO_A10: Q13.1 U1.31 | length 1248.8
  Top Layer w6: v1(2646,1828) 3461,1828 v1(3592,1959)
  Bottom Layer w6: Q13.1 2567.24,1749.24 v1(2646,1828) ; v1(3592,1959) 3592,2010.92 U1.31
I2C1_SCL: P1.4 U1.45 | length 622.6
  Bottom Layer w8: P1.4 3386,2575 3596,2365 3648.52,2365 3672.65,2340.87 3673.23,2340.87 3692.25,2321.85 U1.45
I2C1_SDA: P1.3 U1.46 | length 781.3
  Bottom Layer w8: P1.3 3136,2636 3352,2636 3603,2385 3657.44,2385 U1.46
LOCK_LED: R11.2 U1.29 | length 1176
  Bottom Layer w6: U1.29 3770,2133.24 3770,2580 3848,2658 4108,2658 4209.41,2556.59 R11.2
NetC2_1: C2.1 U1.5 Y1.1 | length 310
  Bottom Layer w6: U1.5 3903,2349.76 3903,2445.43 C2.1 3939.8,2493.43 Y1.1
NetC3_1: C3.1 U1.6 Y1.3 | length 560.3
  Bottom Layer w6: U1.6 3919,2337.92 3919,2413 3953,2447 4042,2447 4049,2454 4049,2537.77 Y1.3 4010.16,2580 4035,2580 4063.43,2551.57 C3.1@4131,2551.57
NetD1_1: D1.1 L1.2 PS1.1 | length 184.4
  Bottom Layer w18: D1.1 4784.57,2475 4790.79,2468.78 ; PS1.1 4790.79,2468.78 ; L1.2 4790.79,2468.78
NetD2_2: D2.2 J2.8 Q1.3 | length 2042.4
  Bottom Layer w20: Q1.3 1670,2375.63 1670,2490 1710,2530 D2.2 1948.35,2643 2661,2643 2890,2414 2990,2414 3212.24,2191.76 J2.8
NetD3_2: D3.2 J2.7 Q2.3 | length 1337.1
  Bottom Layer w20: Q2.3 2220,2380.63 2220,2495 2260,2535 D3.2 2461.35,2459 2762,2459 2845,2376 2954,2376 3163.03,2166.97 J2.7
NetD4_2: D4.2 J2.6 Q3.3 | length 1800.6
  Bottom Layer w20: Q3.3 1665,2045.63 1665,2160 1705,2200 D4.2 1898.35,2268 2049,2268 2076,2295 2607,2295 2648,2336 2917,2336 3113.82,2139.18 J2.6
NetD5_2: D5.2 J2.5 Q4.3 | length 1160.7
  Bottom Layer w20: Q4.3 2220,2050.63 2220,2165 2260,2205 2403.07,2205 2463.07,2265 2668.43,2265 2704.43,2301 2895,2301 3064.61,2131.39 J2.5
NetD6_2: D6.2 J2.4 Q9.3 | length 1870
  Bottom Layer w20: Q9.3 1665,1720.04 1665,1834.41 1705,1874.41 D6.2@1830.35,1874.41 ; D6.2 1903.35,1938 2405.93,1938 2429.93,1962 2615,1962 2720,2067 2720,2239 2745,2264 2870,2264 3015.39,2118.61 J2.4
NetD7_2: D7.2 J2.3 Q10.3 | length 1058.6
  Bottom Layer w20: Q10.3 2220,1720.63 2220,1835 2260,1875 2403.07,1875 2427.52,1899.45 2427.52,1917.17 2442.35,1932 2661,1932 2858,2129 2954.47,2129 2966.18,2117.28 J2.3
NetD8_2: D8.2 J2.2 Q11.3 | length 491.8
  Bottom Layer w20: Q11.3 2769.65,1715.63 2769.65,1830 2809.65,1870 D8.2 2916.97,1888.03 J2.2
NetD9_1: D9.1 J1.A4-B9 J1.B4-A9 | length 643.6
  Top Layer w40: v1(4999,2217) 5000,2216 v1(5000,2030.51)
  Bottom Layer w18: v1(5000,2030.51) J1.B4-A9 ; J1.A4-B9 5057.98,2218.8 5000.8,2218.8 v1(4999,2217) 4999,2391 5038,2430 5086,2430 5099.69,2443.68 D9.1
NetJ1_A5: J1.A5 R3.2 | length 266.4
  Bottom Layer w6: J1.A5 5123.21,2174.21 5147.53,2198.53 R3.2@5147.53,2366
NetJ1_A6: J1.A6 J1.B6 R1.2 | length 409.2
  Bottom Layer w6.06: R1.2 5058.19,2095 J1.B6 5092.45,2095.47 5096,2099.02 5096,2131.29 5092.45,2134.84 J1.A6
NetJ1_A7: J1.A7 J1.B7 R19.2 | length 397.7
  Bottom Layer w6.06: R19.2 4956,2152 4972,2136 4997,2136 ; J1.A7 5057.91,2115.91 5005.09,2115.91 4997,2124 4997,2136 ; J1.B7 5003.53,2154.53 4997,2148 4997,2136
NetJ1_B5: J1.B5 R2.2 | length 267.9
  Bottom Layer w6: J1.B5 5129.9,2056.1 5150,2036 5150,1868.47 R2.2
NetLOCK_L_2: LOCK_L.2 R11.1 | length 381.1
  Top Layer w6: v1(4424,2547) 4496,2475 LOCK_L.2
  Bottom Layer w6: R11.1 4337.59,2547 v1(4424,2547)
NetPS1_3: PS1.3 R4.1 R5.2 | length 162.3
  Bottom Layer w10: R5.2 R4.1 4716.93,2597.4 PS1.3
NetQ1_1: Q1.1 Q5.3 R12.1 | length 193
  Bottom Layer w20: Q1.1 1751.18,2410.59 R12.1 1877.17,2410.59 Q5.3
NetQ2_1: Q2.1 Q6.3 R13.1 | length 193
  Bottom Layer w20: Q2.1 2301.18,2415.59 R13.1 2427.17,2415.59 Q6.3
NetQ3_1: Q3.1 Q7.3 R14.1 | length 193
  Bottom Layer w20: Q3.1 1746.18,2080.59 R14.1 1872.17,2080.59 Q7.3
NetQ4_1: Q4.1 Q8.3 R15.1 | length 193
  Bottom Layer w20: Q4.1 2301.18,2085.59 R15.1 2427.17,2085.59 Q8.3
NetQ9_1: Q9.1 Q12.3 R16.1 | length 193
  Bottom Layer w20: Q9.1 1746.18,1755 R16.1 1872.17,1755 Q12.3
NetQ10_1: Q10.1 Q13.3 R17.1 | length 193
  Bottom Layer w20: Q10.1 2301.18,1755.59 R17.1 2427.17,1755.59 Q13.3
NetQ11_1: Q11.1 Q14.3 R18.1 | length 193
  Bottom Layer w20: Q11.1 2850.83,1750.59 R18.1 2976.81,1750.59 Q14.3
NRST: J3.5 R10.1 U1.7 | length 1575.5
  Top Layer w6: v1(3228,1724) 3352,1724 3404,1776 3744,1776 3759,1791 v1(3759,1838)
  Bottom Layer w6: v1(3228,1724) 3314,1724 J3.5 ; v1(3759,1838) 3758,1839 3758,1912 3767,1921 3767,2097 3800,2130 3800,2173 3794,2179 3794,2225 3818,2249 3857.92,2249 U1.7 3935,2326.08 3935,2362.72 3989.28,2417 4058,2417 4073,2432 4128.18,2432 R10.1
SWCLK: J3.2 U1.37 | length 628.2
  Bottom Layer w6: J3.2 3438,1822.69 3368,1892.69 3368,2083 3465,2180 3550.9,2180 U1.37
SWDIO: J3.3 U1.34 | length 811.4
  Bottom Layer w6: J3.3 3388,1613 3417,1584 3489,1584 3531,1626 3531,1755 3490,1796 3490,1992.44 U1.34
SWO: J3.4 U1.39 | length 695.5
  Bottom Layer w6: J3.4 3388,1850.06 3352,1886.06 3352,2089.63 3465.37,2203 3491,2203 3553,2265 3582.56,2265 U1.39
USB_N: R19.1 U1.32 | length 1586.5
  Bottom Layer w6.06: U1.32 3636.05,2083.83 3616.06,2063.84 3614.63,2063.84 3612.49,2061.7 3605.7,2061.7 3549.06,2005.06 3549.06,1917 3560.94,1905.12 3622.88,1905.12 3752,1776 4189.94,1776 4543.47,2129.53 4693.32,2129.53 4696.87,2133.08 4696.87,2140.46 R19.1
USB_P: R1.1 U1.33 | length 1614.2
  Bottom Layer w6.06: U1.33 3538.68,2013.27 3538.68,2011.74 3537,2010.06 3537,1912 3555.94,1893.06 3617.88,1893.06 3747,1763.94 4194.94,1763.94 4548.47,2117.47 4693.32,2117.47 4696.87,2113.92 4696.87,2106.54 R1.1
Vusb: C4.2 C6.1 D9.3 L1.1 P1.1 PS1.5 U2.1 U2.3 | length 4556.8
  Bottom Layer w18: U2.3 4459.77,1621.89 4424.54,1621.89 4414,1632.43 4414,1682.77 4424.54,1693.31 4459.77,1693.31 U2.1 4499,1695 4510.46,1683.54 5048.54,1683.54 5201,1836 5201,1901 5177,1925 5177,2322 5220,2365 5220,2482 5166.51,2535.49 D9.3 4975.85,2535.49 C6.1 4902.95,2536.34 PS1.5 4889.21,2497.21 4884,2492 4884,2453.57 L1.1
  Bottom Layer w25: P1.1 2875,2641 2928,2694 4310,2694 4359,2743 5019,2743 5080,2682 D9.3
pads on no net: ENC1.3 ENC1.4 J1. J1.1 J1.2 J1.3 J1.4 J1.A8 J1.B8 J2.9 J2.10 J3.A J3.B J3.C U1.1 U1.2 U1.3 U1.4 U1.15 U1.16 U1.18 U1.19 U1.21 U1.22 U1.25 U1.26 U1.27 U1.28 U1.38 U1.40 U2.4

## Polygon pours and split planes (outlines as drawn)
GND on Top Layer "GND_L01_P001" (solid, pour order 1): 5419,2942 5414,2947 1352,2947 1352,1449 1427,1374 5429,1374
GND on Bottom Layer "GND_L02_P000" (solid, pour order 0): 5402.42,2863 1335,2863 1335,1436.57 1410,1361.57 5412,1361.57

## Other copper
Multi-Layer:
  pour cut-out: 1498.36,1504.15 cw(c1498.36,1553.36) 1449.15,1553.36 cw(c1498.36,1553.36) 1498.36,1602.57 cw(c1498.36,1553.36) 1547.57,1553.36 cw(c1498.36,1553.36)
  pour cut-out: 5149.94,2695.09 ccw(c5199.15,2695.09) 5199.15,2645.88 ccw(c5199.15,2695.09) 5248.36,2695.09 ccw(c5199.15,2695.09) 5199.15,2744.31 ccw(c5199.15,2695.09)

## Silkscreen, mask and mechanical layers (free items; w line width, h text height)
Top Overlay:
  text "Attenuator PCB / R.Jhi Mar 23" at 1651,1695 h60
Bottom Overlay:
  text "|GND|B13| / |SWO|DIO| / |CLK|+5V|" at 4065,1892.45 h45 r90
Mechanical 1:
  circle w0.5: c5199.15,2695.09 r49.21
  circle w0.5: c5199.15,1553.36 r49.21
  circle w0.5: c1498.36,1553.36 r49.21
  circle w0.5: c1498.36,2695.09 r49.21
  lines w0.5: 1380.25,1553.36 ccw(c1498.36,1553.36) 1498.36,1435.25 5199.15,1435.25 ccw(c5199.15,1553.36) 5317.26,1553.36 5317.26,2695.09 ccw(c5199.15,2695.09) 5199.15,2813.2 1498.36,2813.2 ccw(c1498.36,2695.09) 1380.25,2695.09 1380.25,1553.36